# Altium PCB New charging pcb.PcbDoc
Units mm, origin at the board's own origin, x right, y up, seen from the top; angles counter-clockwise.
Board outline 55.88 x 55.88 mm, 2 copper layers (Top Layer, Bottom Layer); 10 components, 7 nets, 37 pads, 15 vias.
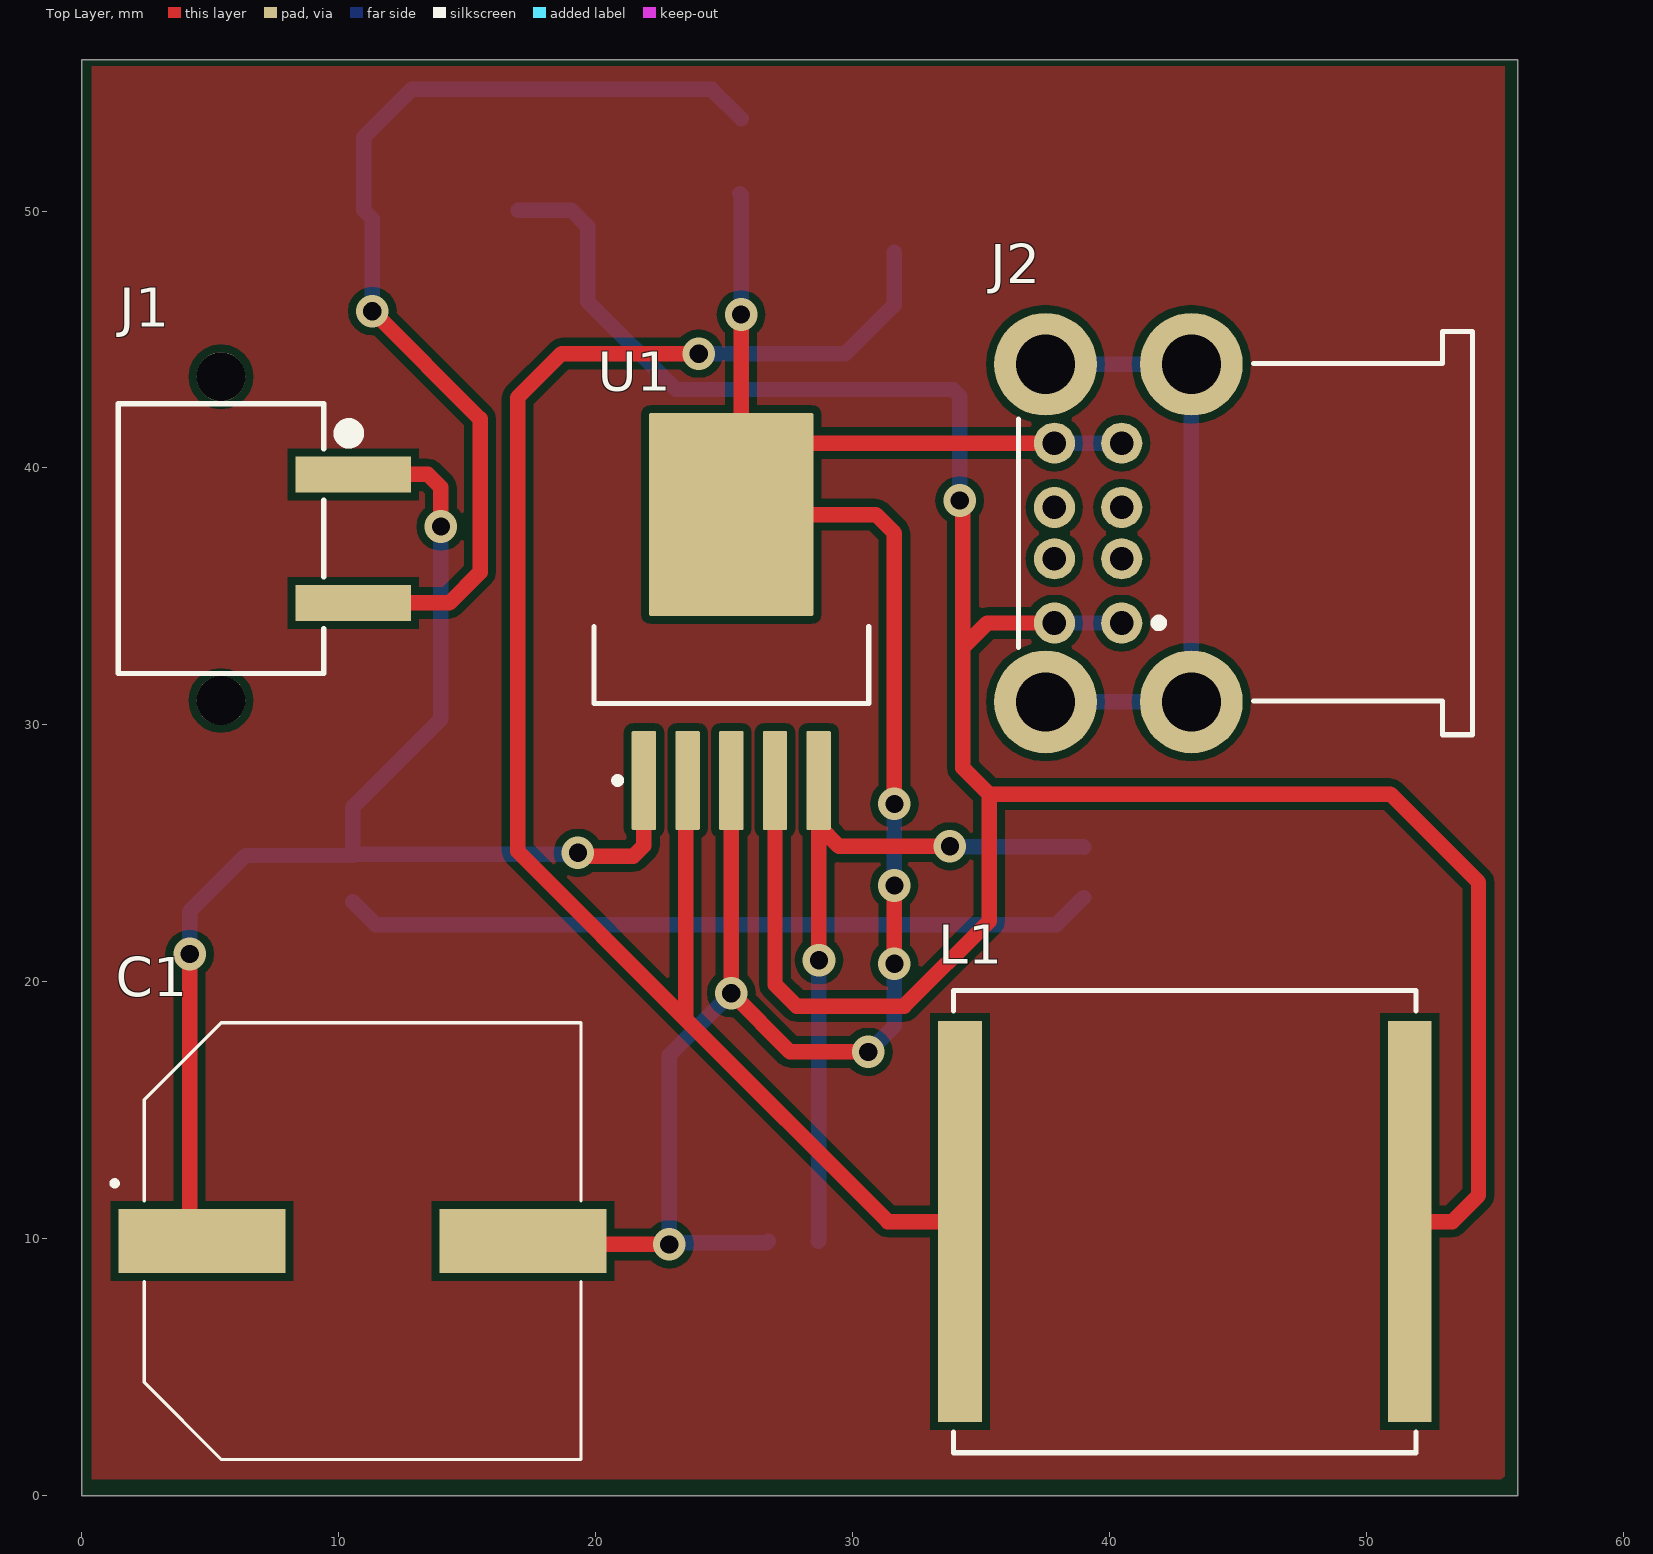
[diagram p0: Top Layer view]
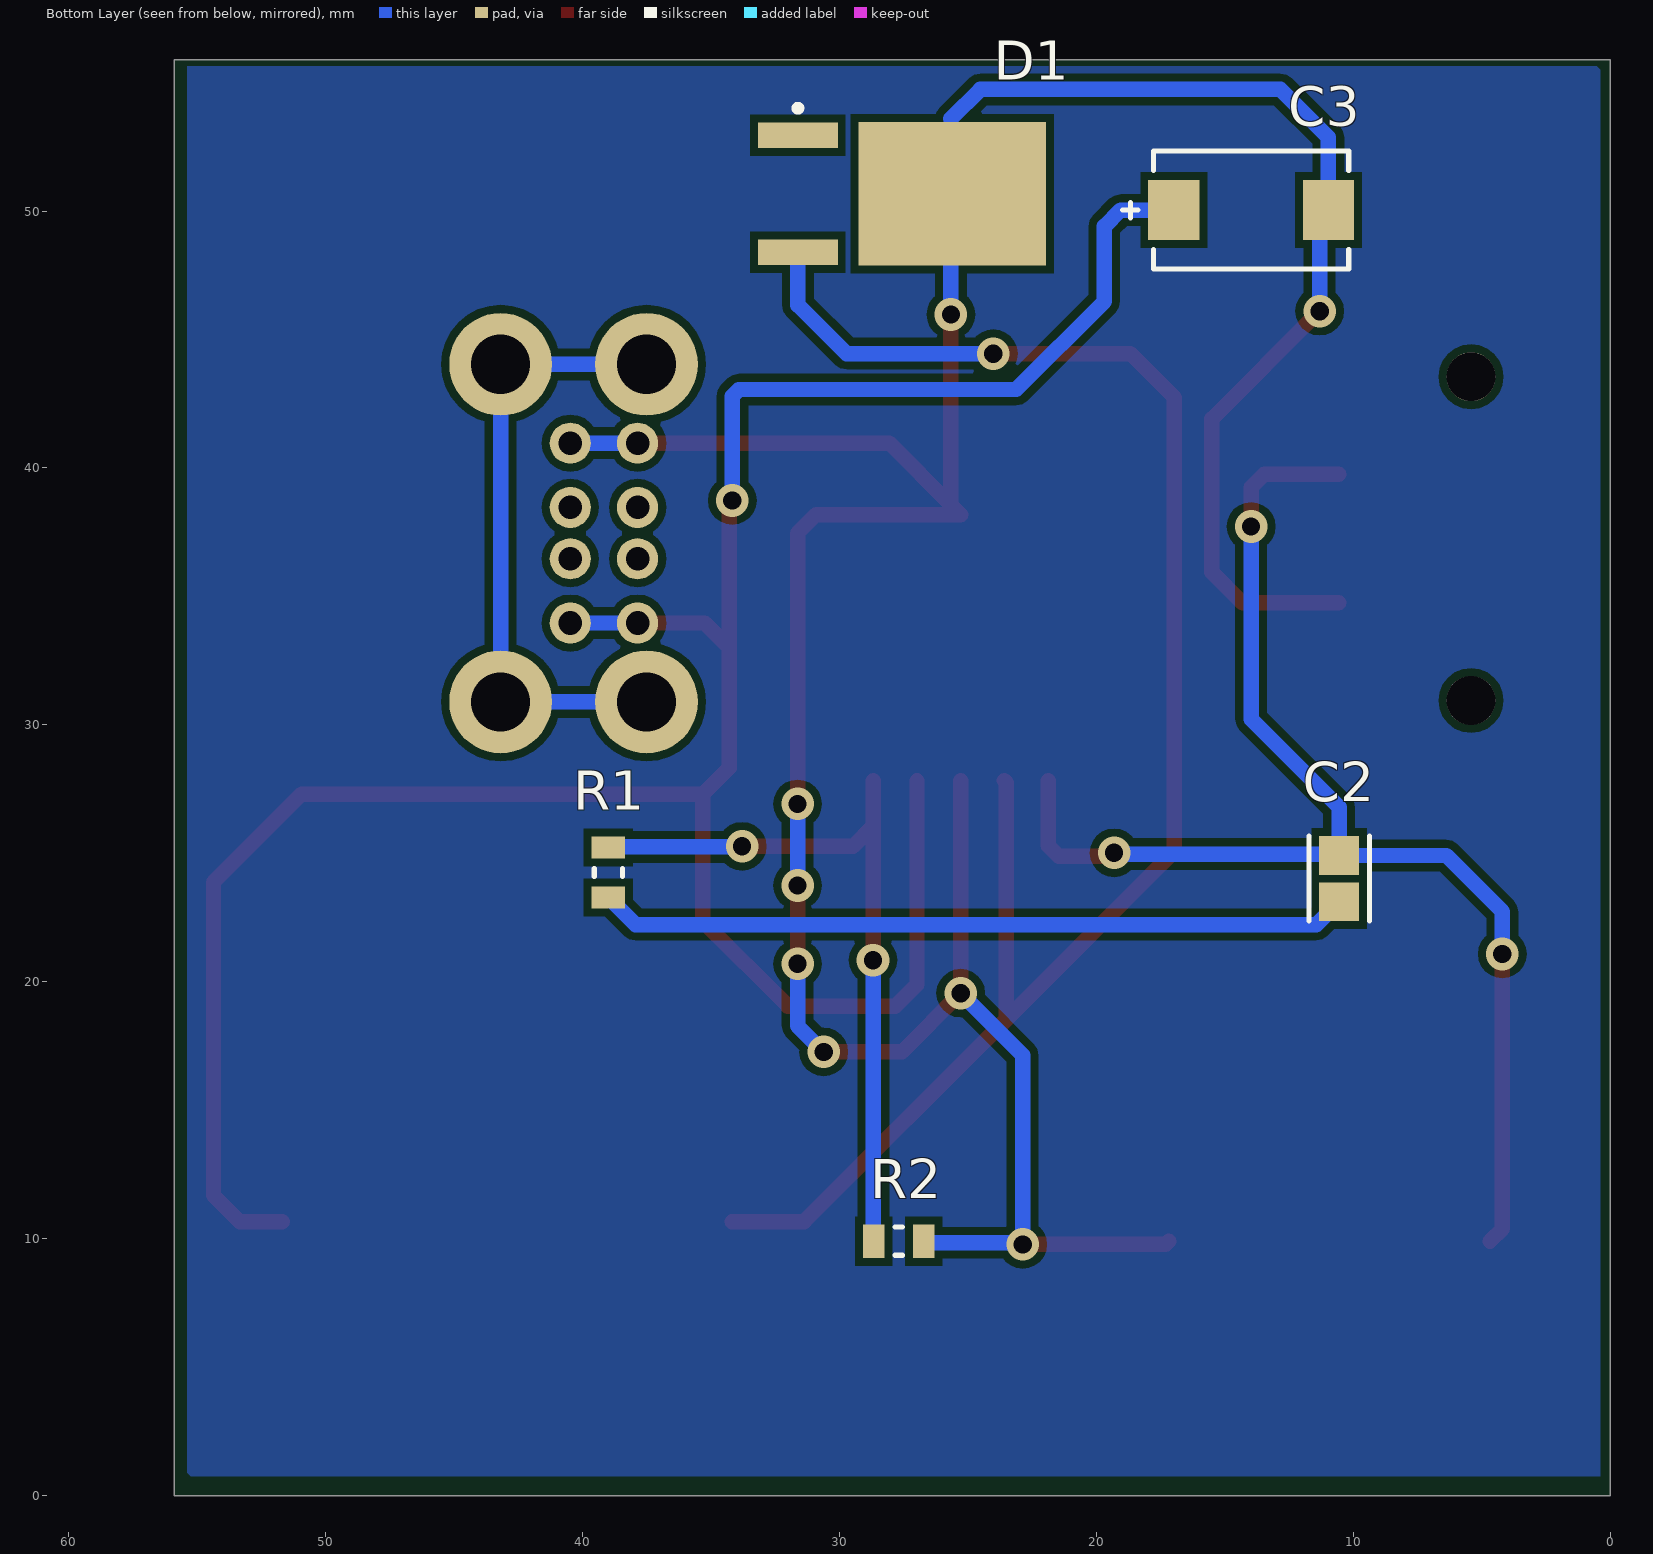
[diagram p1: Bottom Layer view, seen from below]
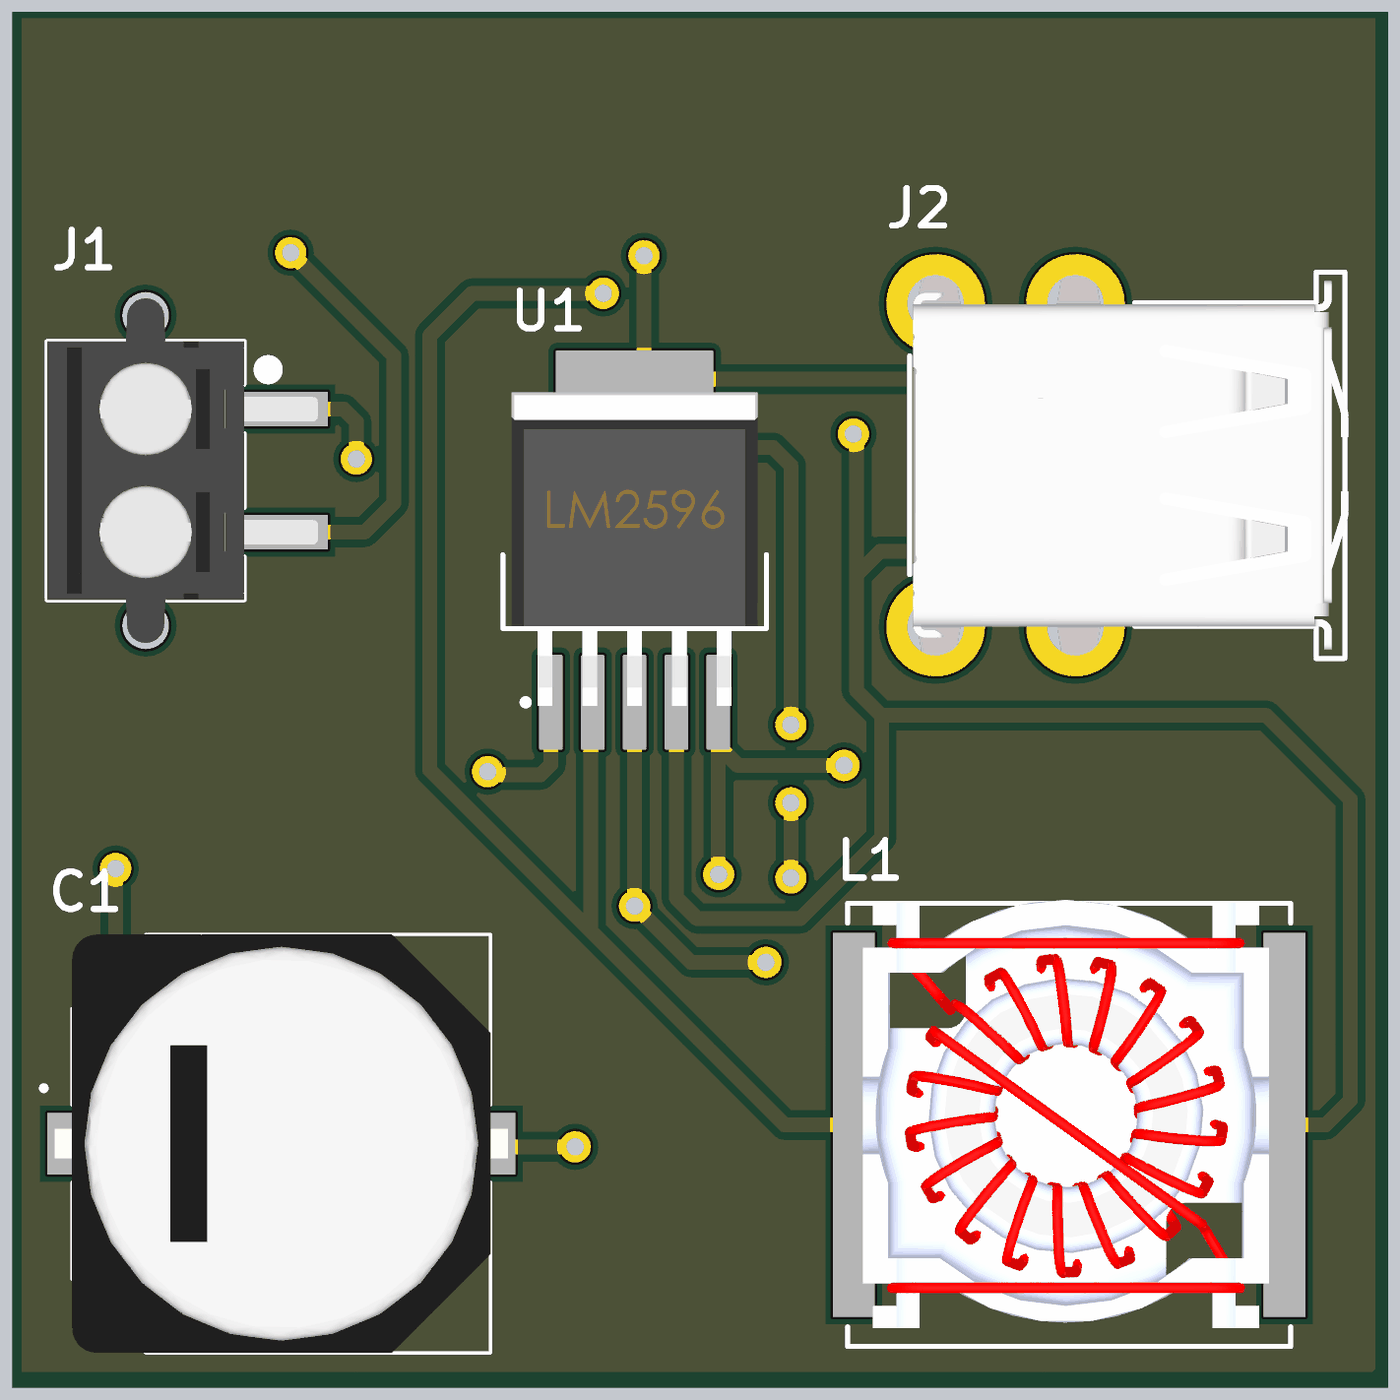
[diagram p2: 3D render of the assembled board from above, using the file's embedded part models]
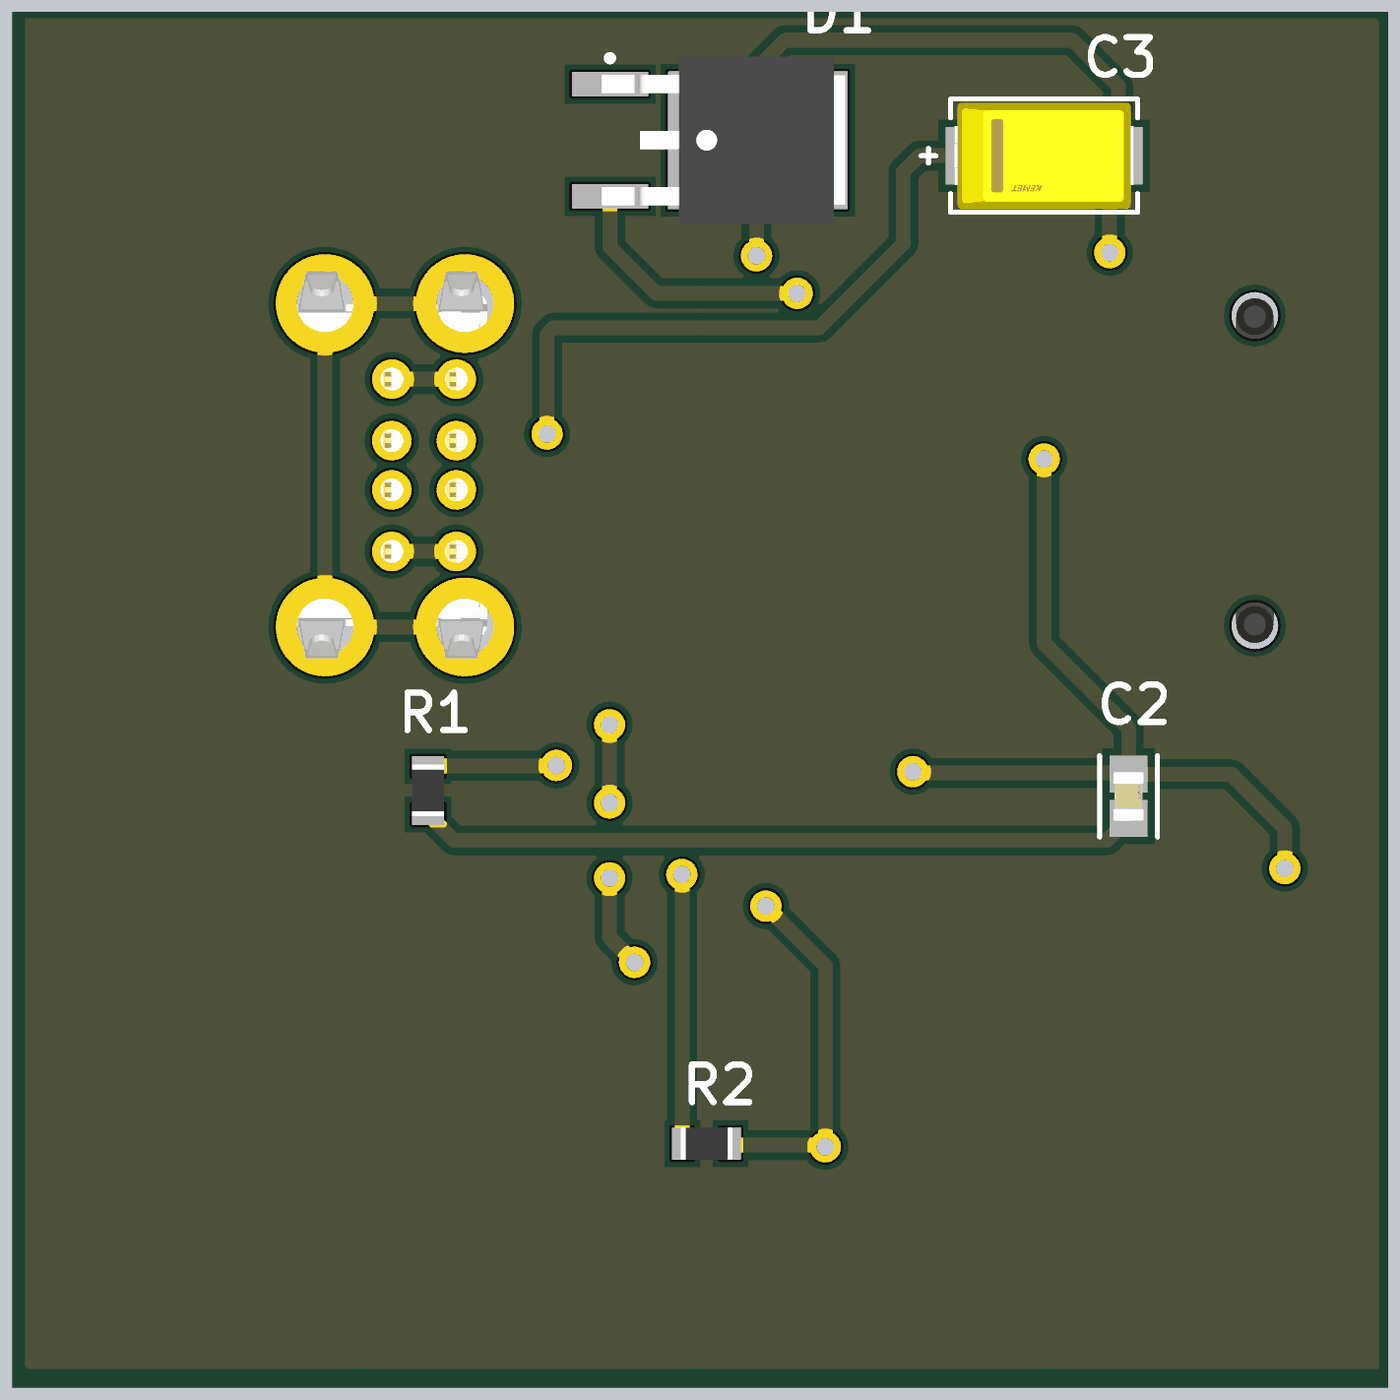
[diagram p3: 3D render of the assembled board from below, using the file's embedded part models]

## Layer stack, top to bottom
Top Solder: solder mask 0.0102, Solder Resist, Dk 3.5
Top Layer: signal copper 0.0356
Dielectric 1: dielectric 0.32, FR-4, Dk 4.8
Bottom Layer: signal copper 0.0356
Bottom Solder: solder mask 0.0102, Solder Resist, Dk 3.5

## Board outline
0,0 55.88,0 55.88,55.88 0,55.88

## Design rules (kind name [scope] priority, off if disabled: settings)
Clearance [All] p1: gap=0.3 ignorepadtopadclearanceinfootprint=FALSE
PolygonConnect [All] p1: connectstyle=Relief reliefconductorwidth=0.254 reliefentries=4 polygonreliefangle="90 Angle" airgapwidth=0.254
RoutingVias [All] p1: holewidth=1 width=0.6 viastyle="Through Hole" minholewidth=1 minwidth=0.6 maxholewidth=1 maxwidth=0.6
SolderMaskExpansion [All] p1: expansion=0.102
Width [All] p1: maxlimit=1 minlimit=0.3 preferedwidth=0.6
30 further rules are at their usual default settings.

## Components (designator, comment, footprint, x,y, rotation, side; value= is the part's Value field where it differs from the comment)
C1 "680uF 50V 20%" EEE-TKH681UAM 10.795,10.033 r0 top
C2 "0.1uF 10V 10%" C0805C104K8RAC7800 10.287,24.015 r270 bottom
C3 "220uF 16V 10%" T495X227K016ATE100 13.97,50.038 r0 bottom
D1 "Diode Schottky 30V" VS-50WQ03FNTR-M3 27.559,50.673 r180 bottom
J1 "Terminal Block" "Terminal Block" 5.588,37.338 r270 top
J2 "USB1035" USB1035 43.18,37.465 r90 top
L1 "25uH 20%" PE-54041SNL 42.926,10.668 r0 top
R1 "47K 1%" RCC080547K0FKEA 38.989,24.257 r90 bottom
R2 "47K 1%" RCC080547K0FKEA 27.686,9.906 r0 bottom
U1 "LM2596S-5.0" LM2596S-5.0 25.146,34.163 r90 top

## Footprints (in the part's own frame and the unit in brackets; to place one, negate y for a bottom-side part, rotate by r counter-clockwise, add the part's x,y. Pads: shape width x height; smd on the part's side, far side on the other; paste and mask are expansions set on the pad)
C0805C104K8RAC7800 [mil]
  rect 59.24x61.27 smd paste+0 mask+0: 1(-35.46,-10) 2(35.46,-10)
  silkscreen extent -65,-56 65,36, body extent -39,-35 39,15, height 35
EEE-TKH681UAM [mm]
  rect 6.5x2.5 smd: 1(-6.123,-0.127) 2(6.377,-0.127)
  silkscreen extent -9.62,-8.63 8.63,8.37, body extent -9.07,-8.63 9.33,8.37, height 16.5
LM2596S-5.0 [mm]
  rrect11% 3.85x0.95 smd: 1(-6.327,3.273) 2(-6.327,1.573) 3(-6.327,-0.127) 4(-6.327,-1.827) 5(-6.327,-3.527)
  rrect2% 7.9x6.4 smd: 6(4.023,-0.127)
  silkscreen extent -6.45,-5.48 -0.33,5.22, body extent -6.48,-5.13 6.26,4.87, height 4.52
PE-54041SNL [mm] "Precision Wire Wound Inductor, 2-Leads, Body 17.50x17.50mm, IPC Medium Density"
  rect 1.7x15.6 smd: 1(-8.75,0) 2(8.75,0)
  silkscreen extent -9,-9 9,9, body extent -8.38,-8.25 8.13,9.14, height 9.59
RCC080547K0FKEA [mm] "Chip Resistor, 2-Leads, Body 2.00x1.25mm, IPC Medium Density"
  rect 0.85x1.3 smd: 1(-0.975,0) 2(0.975,0)
  silkscreen extent -0.15,-0.55 0.15,0.55, body extent -1.05,-0.65 1.05,0.65, height 0.6
T495X227K016ATE100 [mm]
  rect 1.99x2.33 smd paste+0 mask+0: 1(-3.01,0) 2(3.01,0)
  silkscreen extent -3.8,-2.3 5,2.3, body extent -3.65,-2.15 3.65,2.15, height 4.2
"Terminal Block" [mm]
  rect 1.4x4.5 smd: 1(-2.411,4.973) 2(2.589,4.973)
  round 1.9 hole 1.9 unplated: M1(-6.211,-0.177) M2(6.389,-0.177)
  silkscreen extent -5.16,-4.18 5.34,4.99, body extent -6.91,-4.18 7.09,6.82, height 9.95
USB1035 [mm]
  round 1.6 hole 0.92: 1A(-3.5,5.33) 1B(-3.5,2.71) 2A(-1,5.33) 2B(-1,2.71) 3A(1,5.33) 3B(1,2.71) 4A(3.5,5.33) 4B(3.5,2.71)
  round 4 hole 2.3: 9(-6.57,0) 10(6.57,0) 11(-6.57,5.68) 12(6.57,5.68)
  silkscreen extent -7.85,-10.95 7.85,6.73, body extent -7.86,-11.09 7.86,6.59, height 16.17
VS-50WQ03FNTR-M3 [mm] "D-PAK, 3-Pads, Body 6.25x6.76mm (max), IPC Medium Density"
  rect 3.1x1 smd: 1(-4.05,2.28) 3(-4.05,-2.28)
  rect 7.3x5.6 smd: 2(1.95,0)
  silkscreen extent -4.18,3.21 -3.93,3.45, body extent -4.4,-3.4 5.5,3.4, height 2.5

## Part data
C1: library part EEE-TKH681UAM, "Cap Aluminum Lytic 680uF 50V 20%( 16 X 16.5mm) SMD 0.15 Ohm 900mA 2000h 125C Automotive T/R", Capacitance=680uF, Case/Package=SMD/SMT, ESR (Equivalent Series Resistance)=150mR, Leakage Current=340uA, Manufacturer=Panasonic, Max Operating Temperature=125°C, Min Operating Temperature=-40°C, Package Quantity=125, Ripple Current=900mA, Supplier Part Number 1=PCE4901DKR-ND, Tolerance=20%, Voltage=50V, Category="Aluminum Electrolytic Capacitors", ComponentLink1Description=https://datasheet.ciiva.com/11777/0900766b8102e63d-11777129.pdf?src-supplier=RSComponents, ComponentLink1URL=https://datasheet.ciiva.com/11777/0900766b8102e63d-11777129.pdf?src-supplier=RSComponents, ComponentLink2Description=https://datasheet.ciiva.com/43461/1843634-43461190.pdf?src-supplier=Farnell, ComponentLink2URL=https://datasheet.ciiva.com/43461/1843634-43461190.pdf?src-supplier=Farnell, ComponentLink3Description=https://datasheet.ciiva.com/46438/1843634-46438041.pdf?src-supplier=Element14, ComponentLink3URL=https://datasheet.ciiva.com/46438/1843634-46438041.pdf?src-supplier=Element14, ComponentLink4Description=https://datasheet.ciiva.com/24036/aba0000ce121-470559-24036796.pdf?src-supplier=Mouser, ComponentLink4URL=https://datasheet.ciiva.com/24036/aba0000ce121-470559-24036796.pdf?src-supplier=Mouser, Construction=Cylindrical, Diameter=16mm, Height=16.5mm, Height - Seated (Max)=0.65inch, Lead Diameter=1.2mm, Lead Pitch=6.7mm, Length=16.5mm, Life (Hours)=2000Hour, Manufacturer Part Number=EEE-TKH681UAM, Mount="Surface Mount", Number of Pins=16, Packaging="Tape and Reel", Polarity=Polar, Pricing 1="1=3.03000, 10=2.44800, 50=2.13660 (USD)", REACH SVHC="No SVHC", Ripple Current (AC)=900mA, RoHS=Yes, RoHS Compliant=Yes, Series=TK, Supplier 1=Digi-Key, Termination=SMD/SMT, Voltage Rating=50V, Voltage Rating (DC)=50V
C2: library part C0805C104K8RACTU, "Cap Ceramic 0.1uF 10V X7R 10% SMD 0805 125°C Paper T/R", Capacitance=100nF, Case/Package=0805, Case Code (Metric)=2012, Dielectric=X7R, Dielectric Material=Ceramic, Manufacturer=KEMET, Max Operating Temperature=125°C, Min Operating Temperature=-55°C, Package Quantity=1, Supplier Part Number 1=399-C0805C104K8RAC7800CT-ND, Tolerance=10%, Voltage Rating=10V, Case Code (Imperial)=0805, Category="Ceramic Capacitors", ComponentLink1Description=http://components.arrow.com/part/dataview/2091095S5871853N7429?src-supplier=Arrow+Electronics, ComponentLink1URL=http://components.arrow.com/part/dataview/2091095S5871853N7429?src-supplier=Arrow+Electronics, ComponentLink2Description=http://www.farnell.com/datasheets/2323363.pdf?src-supplier=Farnell, ComponentLink2URL=http://www.farnell.com/datasheets/2323363.pdf?src-supplier=Farnell, ComponentLink3Description=http://components.arrow.com/part/dataview/0323_00324172?src-supplier=Arrow+Europe, ComponentLink3URL=http://components.arrow.com/part/dataview/0323_00324172?src-supplier=Arrow+Europe, ComponentLink4Description=http://www.mouser.com/ds/2/212/KEM_C1002_X7R_SMD-1102033.pdf?src-supplier=Mouser, ComponentLink4URL=http://www.mouser.com/ds/2/212/KEM_C1002_X7R_SMD-1102033.pdf?src-supplier=Mouser, ComponentLink5Description=http://www.farnell.com/datasheets/2746328.pdf?src-supplier=Farnell, ComponentLink5URL=http://www.farnell.com/datasheets/2746328.pdf?src-supplier=Farnell, ComponentLink6Description=http://www.farnell.com/datasheets/2746328.pdf?src-supplier=Newark, ComponentLink6URL=http://www.farnell.com/datasheets/2746328.pdf?src-supplier=Newark, ComponentLink7Description=https://api.kemet.com/component-edge/download/datasheet/C0805C104K8RACTU.pdf?src-supplier=Digi-Key, ComponentLink7URL=https://api.kemet.com/component-edge/download/datasheet/C0805C104K8RACTU.pdf?src-supplier=Digi-Key, Depth=1.25mm, Dissipation Factor=5%, Height=0.9mm, Lead Pitch=0.75mm, Length=2mm, Manufacturer Part Number=C0805C104K8RACTU, Mount="Surface Mount", Packaging="Tape and Reel", Pricing 1="1=0.18000, 10=0.13000, 50=0.07400, 100=0.06120, 500=0.04294, 1000=0.03555 (USD)", REACH SVHC="No SVHC", RoHS=Yes, RoHS Compliant=Yes, Series=C, Stock 1=109094, Supplier 1=Digi-Key, Termination=SMD/SMT, Thickness=0.035inch, Voltage Rating (DC)=10V, Width=1.2mm
C3: library part T495X227K016ATE100, "220uF Solid MnO2 Tantalum Electrolytic Capacitor; 16 V dc +/-10%; T495 Series", Capacitance=220uF, Case/Package=2917, Case Code (Metric)=7343, Dielectric Material=Tantalum, ESR (Equivalent Series Resistance)=100mR, Leakage Current=35.2uA, Manufacturer=KEMET, Max Operating Temperature=125°C, Min Operating Temperature=-55°C, Package Quantity=500, Supplier Part Number 1=399-10409-2-ND, Tolerance=10%, Voltage=16V, Case Code (Imperial)=2917, Category="Tantalum Capacitors", ComponentLink1Description=https://datasheet.ciiva.com/46391/1881875-46391927.pdf?src-supplier=Element14, ComponentLink1URL=https://datasheet.ciiva.com/46391/1881875-46391927.pdf?src-supplier=Element14, ComponentLink2Description=https://datasheet.ciiva.com/14589/70095916-14589262.pdf?src-supplier=Allied+Electronics, ComponentLink2URL=https://datasheet.ciiva.com/14589/70095916-14589262.pdf?src-supplier=Allied+Electronics, ComponentLink3Description=https://datasheet.ciiva.com/46445/1818808-46445950.pdf?src-supplier=Element14, ComponentLink3URL=https://datasheet.ciiva.com/46445/1818808-46445950.pdf?src-supplier=Element14, Construction=Flat, Depth=4.3mm, Dissipation Factor=8%, Features="General Purpose", Height=4mm, Height - Seated (Max)=0.169inch, Lead Free="Lead Free", Lead Pitch=3.8mm, Length=7.3mm, Life (Hours)=2000Hour, Manufacturer Part Number=T495X227K016ATE100, Mount="Surface Mount,PCB", Packaging="Tape and Reel", Polarity=Polar, Pricing 1="500=1.88794 (USD)", Radiation Hardening=No, REACH SVHC="No SVHC", RoHS=Yes, RoHS Compliant=Yes, Series=T495, Stock 1=20691, Supplier 1=Digi-Key, Termination=SMD/SMT, Voltage Rating=16V, Voltage Rating (DC)=16V, Width=0.169inch
D1: library part VS-50WQ03FNTR-M3, "Rectifier Diode Schottky 30V 5.5A 3-Pin(2+Tab) DPAK T/R", Average Rectified Current=5.5A, Case/Package=TO-252AA, Forward Voltage=530mV, Manufacturer="Vishay Semiconductors", Max Forward Surge Current (Ifsm)=320A, Max Operating Temperature=150°C, Max Repetitive Reverse Voltage (Vrrm)=30V, Max Reverse Current=3mA, Min Operating Temperature=-40°C, Supplier Part Number 1=112-VS-50WQ03FNTR-M3CT-ND, Category="Rectifier Diodes", ComponentLink1Description=http://www.farnell.com/datasheets/2148614.pdf?src-supplier=Farnell, ComponentLink1URL=http://www.farnell.com/datasheets/2148614.pdf?src-supplier=Farnell, ComponentLink2Description=http://components.arrow.com/part/dataview/0323_03485198?src-supplier=Arrow+Europe, ComponentLink2URL=http://components.arrow.com/part/dataview/0323_03485198?src-supplier=Arrow+Europe, ComponentLink3Description=http://www.mouser.com/ds/2/427/50wq03fn-1074205.pdf?src-supplier=Mouser, ComponentLink3URL=http://www.mouser.com/ds/2/427/50wq03fn-1074205.pdf?src-supplier=Mouser, ComponentLink4Description=http://www.farnell.com/datasheets/2148614.pdf?src-supplier=Element14, ComponentLink4URL=http://www.farnell.com/datasheets/2148614.pdf?src-supplier=Element14, ComponentLink5Description=http://www.vishay.com/docs/93311/50wq03fn.pdf?src-supplier=Digi-Key, ComponentLink5URL=http://www.vishay.com/docs/93311/50wq03fn.pdf?src-supplier=Digi-Key, ComponentLink6Description=http://www.vishay.com/docs/93311/50wq03fn.pdf?src-supplier=Avnet, ComponentLink6URL=http://www.vishay.com/docs/93311/50wq03fn.pdf?src-supplier=Avnet, Element Configuration="Common Anode", Forward Current=5.5A, Manufacturer Part Number=VS-50WQ03FNTR-M3, Max Reverse Voltage (DC)=30V, Mount="Surface Mount", Number of Pins=3, Packaging="Tape and Reel", Peak Non-Repetitive Surge Current=320A, Pricing 1="1=0.81000, 10=0.71000, 100=0.54410, 500=0.43010, 1000=0.34408 (USD)", REACH SVHC="No SVHC", RoHS=Yes, RoHS Compliant=Yes, Series=-, Stock 1=4025, Supplier 1=Digi-Key
J1: library part 691709710302, "Conn Terminal Block F 2 POS 5mm Solder RA SMD 6A T/R", Color=Black, Current=6A, Flammability Rating="UL94 V-0", Manufacturer="Wurth Electronics Midcom", Max Operating Temperature=115°C, Min Operating Temperature=-40°C, Package Quantity=1, Supplier Part Number 1=1297-1108-1-ND, Voltage=300V, Category="Terminal Blocks", ComponentLink1Description=http://www.mouser.com/ds/2/445/6917097103xx-271684.pdf?src-supplier=Mouser, ComponentLink1URL=http://www.mouser.com/ds/2/445/6917097103xx-271684.pdf?src-supplier=Mouser, ComponentLink2Description=http://katalog.we-online.de/em/datasheet/6917097103xx.pdf?src-supplier=Digi-Key, ComponentLink2URL=http://katalog.we-online.de/em/datasheet/6917097103xx.pdf?src-supplier=Digi-Key, ComponentLink3Description=https://katalog.we-online.de/em/datasheet/6917097103xx.pdf?src-supplier=Digi-Key, ComponentLink3URL=https://katalog.we-online.de/em/datasheet/6917097103xx.pdf?src-supplier=Digi-Key, ComponentLink4Description=http://www.farnell.com/cad/1804164.pdf?src-supplier=Element14, ComponentLink4URL=http://www.farnell.com/cad/1804164.pdf?src-supplier=Element14, Connector Type=Screw, Contact Plating=Tin, Current Rating=6A, Housing Material=Nylon, Manufacturer Part Number=691709710302, Mount="Surface Mount", Number of Contacts=2, Number of Levels=1, Number of Positions=2, Number of Positions Per Level=2, Packaging="Tape and Reel", Pitch=0.197inch, Plating=Steel, Pricing 1="1=2.89000, 10=2.56200, 50=2.41200, 100=2.26000 (USD)", REACH SVHC=Unknown, RoHS=Yes, RoHS Compliant=Yes, Stock 1=1256, Supplier 1=Digi-Key, Termination=Screw, Voltage Rating=300V, Wire/Cable Gauge=30AWG, Wire Gauge (Max)=30AWG, Wire Gauge (Min)=14AWG
J2: library part USB1035-GF-P-0-B-B, "USB1035 Series 8 Position Dual Port Through Hole USB", Manufacturer="Global Connector Technology", Supplier Part Number 1=2073-USB1035-GF-P-0-B-B-ND, Category="USB Connectors", Connector Type=USB, Contact Material=Brass, Contact Plating=Gold, Manufacturer Part Number=USB1035-GF-P-0-B-B, Orientation="Right Angle", RoHS=Yes, RoHS Compliant=Yes, Supplier 1=Digi-Key
L1: library part PE-54041SNL, "PE-5XXXX SMT Toroid Inductor series for National 150kHz Simple Switcher, Up To 4.5A", Case/Package=SMD/SMT, Current Rating=3A, DC Resistance (DCR)=40mR, Inductance=25uH, Manufacturer=Pulse, Max Operating Temperature=130°C, Min Operating Temperature=-40°C, Package Quantity=30, Supplier Part Number 1=553-1424-ND, Tolerance=20%, Category="Fixed Inductors", ComponentLink1Description=http://components.arrow.com/part/dataview/42118542S8144333N6149?src-supplier=Arrow+Electronics, ComponentLink1URL=http://components.arrow.com/part/dataview/42118542S8144333N6149?src-supplier=Arrow+Electronics, ComponentLink2Description=http://components.arrow.com/part/dataview/0323_01095901?src-supplier=Arrow+Europe, ComponentLink2URL=http://components.arrow.com/part/dataview/0323_01095901?src-supplier=Arrow+Europe, ComponentLink3Description=http://www.mouser.com/ds/2/336/-268328.pdf?src-supplier=Mouser, ComponentLink3URL=http://www.mouser.com/ds/2/336/-268328.pdf?src-supplier=Mouser, ComponentLink4Description=http://productfinder.pulseeng.com/products/datasheets/SPM2007_47.pdf?src-supplier=Avnet, ComponentLink4URL=http://productfinder.pulseeng.com/products/datasheets/SPM2007_47.pdf?src-supplier=Avnet, ComponentLink5Description=https://www.verical.com/server-webapp/html/getDatasheet?partID=180366&src-supplier=Verical, ComponentLink5URL=https://www.verical.com/server-webapp/html/getDatasheet?partID=180366&src-supplier=Verical, ComponentLink6Description=http://ww2.pulseeng.com/products/datasheets/SPM2007_47.pdf?src-supplier=Avnet+Europe, ComponentLink6URL=http://ww2.pulseeng.com/products/datasheets/SPM2007_47.pdf?src-supplier=Avnet+Europe, ComponentLink7Description=http://productfinder.pulseeng.com/products/datasheets/SPM2007_47.pdf?src-supplier=Digi-Key, ComponentLink7URL=http://productfinder.pulseeng.com/products/datasheets/SPM2007_47.pdf?src-supplier=Digi-Key, DC Current=3A, Depth=17.02mm, Height=0.39inch, Lead Free="Lead Free", Length=17.78mm, Manufacturer Part Number=PE-54041SNL, Max DC Current=3A, Military Standard=Not, Mount="Surface Mount", Packaging=Bulk, Pricing 1="1=3.06000, 10=2.80500, 25=2.55040, 50=2.14220, 100=1.83620, 250=1.73416, 500=1.63216, 1000=1.53015, 2500=1.47914 (USD)", Radiation Hardening=No, RoHS=Yes, RoHS Compliant=Yes, Series=LCI, Shielding=Unshielded, Stock 1=1837, Supplier 1=Digi-Key, Termination=SMD/SMT, Width=0.67inch
R1 R2: library part RCC080547K0FKEA, "RCC0805 100 47K 1% ET1 E3", Manufacturer="Vishay Dale", Supplier Part Number 1=541-RCC080547K0FKEACT-ND, Category="Chip SMD Resistors", Manufacturer Part Number=RCC080547K0FKEA, Pricing 1="1=0.19000, 10=0.16100, 100=0.06280, 1000=0.02629, 2500=0.02410 (USD)", RoHS=Yes, Stock 1=8153, Supplier 1=Digi-Key
U1: "SIMPLE SWITCHER® 4.5V to 40V, 3A Low Component Count Step-Down Regulator 5-DDPAK/TO-263", Case/Package=TO-263-5, Manufacturer="TI National Semiconductor", Max Input Voltage=40V, Max Operating Temperature=125°C, Max Output Current=3A, Min Input Voltage=4.5V, Min Operating Temperature=-40°C, Min Output Voltage=5V, Package Quantity=45, Quiescent Current=5mA, Supplier Part Number 1=LM2596S-5.0-ND, Switching Frequency=173kHz, Category="Voltage Regulators - Switching", ComponentLink1Description=https://datasheet.ciiva.com/26897/lm2596s-5-0-26897357.pdf?src-supplier=IIIC, ComponentLink1URL=https://datasheet.ciiva.com/26897/lm2596s-5-0-26897357.pdf?src-supplier=IIIC, ComponentLink2Description=https://datasheet.ciiva.com/15223/getdatasheetpartid-113337-15223053.pdf?src-supplier=Verical, ComponentLink2URL=https://datasheet.ciiva.com/15223/getdatasheetpartid-113337-15223053.pdf?src-supplier=Verical, ComponentLink3Description=https://datasheet.ciiva.com/14303/lm2596-14303582.pdf?src-supplier=Avnet, ComponentLink3URL=https://datasheet.ciiva.com/14303/lm2596-14303582.pdf?src-supplier=Avnet, Efficiency=80%, Lead Free="Contains Lead", Manufacturer Part Number=LM2596S-5.0, Mount="Surface Mount", Nominal Output Voltage=5V, Number of Outputs=1, Number of Pins=5, Operating Supply Voltage=40V, Output Configuration=Positive, Output Current=3A, Output Type=Fixed, Output Voltage=5V, Packaging=Rail/Tube, Pricing 1="1=9.62000, 10=8.68800, 25=8.28360, 100=7.19250, 250=6.86924, 500=6.67100 (USD)", Radiation Hardening=No, REACH SVHC="No SVHC", RoHS=No, RoHS Compliant=No, Series="SIMPLE SWITCHER®", Stock 1=935, Supplier 1=Digi-Key, Synchronous Rectifier=No

## Via types
v1: diameter 1.27, hole 0.711, Top Layer to Bottom Layer, 15 vias

## Nets (pads, with @x,y where several pads share a name; then routed paths per layer and width w, separated by ;. In a path a pad name is that pad's centre, name@x,y a point inside that pad or via, vN(x,y) a via of type N, cw(c..) or ccw(c..) an arc to the next point about the centre after c; other vN are vias at no path point)
GND: C1.2 C3.1 D1.2 J1.2 J2.4A J2.4B R2.1 U1.3 U1.6 | length 130.9
  Top Layer w0.6: J1.2 14.302,34.749 15.494,35.941 15.494,41.91 v1(11.303,46.101) ; C1.2 17.299,9.779 v1(22.86,9.779) ; U1.3 v1(25.273,19.558) 27.559,17.272 v1(30.607,17.272) ; v1(25.654,45.974) U1.6@25.654,38.567 ; v1(31.623,20.701) v1(31.623,23.749) ; v1(31.623,26.924) 31.623,37.465 30.902,38.186 U1.6 U1.6@25.654,38.567 ; J2.4A 28.052,40.965 U1.6@25.654,38.567
  Bottom Layer w0.6: v1(11.303,46.101) 11.303,49.695 C3.1 10.96,52.87 12.827,54.737 24.511,54.737 25.654,53.594 ; v1(25.273,19.558) 22.86,17.145 v1(22.86,9.779) 22.924,9.842 26.648,9.842 R2.1 ; D1.2 25.654,50.628 v1(25.654,45.974) ; v1(30.607,17.272) 31.623,18.288 v1(31.623,20.701) ; v1(31.623,23.749) v1(31.623,26.924) ; J2.4A J2.4B
IN: C1.1 C2.1 J1.1 U1.1 | length 53.6
  Top Layer w0.6: v1(4.191,21.082) 4.191,10.387 C1.1 ; J1.1 13.464,39.749 13.97,39.243 v1(13.97,37.719) ; v1@19.431,24.892 21.463,24.892 21.873,25.302 U1.1
  Bottom Layer w0.6: v1(4.191,21.082) 4.191,22.733 6.374,24.916 C2.1 ; v1(13.97,37.719) 13.97,30.226 10.541,26.797 C2.1 ; v1(19.304,25.019) 19.252,24.967 10.593,24.967 C2.1
NetC2_2: C2.2 R1.1 | length 29.3
  Bottom Layer w0.6: C2.2 11.43,22.225 37.932,22.225 R1.1
NetD1_3: D1.3 L1.1 U1.2 | length 68.4
  Top Layer w0.6: U1.2 23.495,27.758 23.495,18.542 ; v1(24.003,44.45) 18.669,44.45 16.954,42.735 16.954,25.082 23.495,18.542 ; L1.1 31.369,10.668 23.495,18.542
  Bottom Layer w0.6: v1(24.003,44.45) 29.718,44.45 31.609,46.341 D1.3
NetJ2_9: J2.9 J2.10 J2.11 J2.12 | length 24.5
  Bottom Layer w0.6: J2.11 J2.9 J2.10 J2.12
NetR1_2: R1.2 R2.2 U1.5 | length 28.6
  Top Layer w0.6: U1.5 28.673,20.857 v1(28.687,20.843) v1@28.702,20.828 ; U1.5@28.702,26.035 29.464,25.273 v1(33.782,25.273)
  Bottom Layer w0.6: R2.2 28.674,9.919 28.674,20.829 v1(28.687,20.843) ; v1(33.782,25.273) 33.802,25.253 38.968,25.253 R1.2
OUT: C3.2 J2.1A J2.1B L1.2 U1.4 | length 103.1
  Top Layer w0.6: U1.4 26.973,19.89 27.813,19.05 32.004,19.05 35.306,22.352 35.306,27.305 ; v1(34.163,38.735) 34.29,38.608 34.29,33.02 ; J2.1A 35.235,33.965 34.29,33.02 ; L1.2 53.34,10.668 54.356,11.684 54.356,23.876 50.927,27.305 35.306,27.305 ; 34.29,33.02 34.29,28.321 35.306,27.305
  Bottom Layer w0.6: C3.2 19.05,50.038 19.685,49.403 19.685,46.482 23.114,43.053 33.909,43.053 34.163,42.799 v1(34.163,38.735) ; J2.1A J2.1B
pads on no net: D1.1 J1.M1 J1.M2 J2.2A J2.2B J2.3A J2.3B

## Polygon pours and split planes (outlines as drawn)
no net on Top Layer (solid, pour order 0): 0.381,55.626 55.372,55.626 55.372,0.762 55.245,0.635 0.381,0.635
no net on Bottom Layer (solid, pour order 2): 55.372,55.626 55.372,0.889 55.245,0.762 0.381,0.762 0.381,55.499 0.508,55.626